# Altium PCB RF_PCB1.PcbDoc
Units mm, origin at the board's own origin, x right, y up, seen from the top; angles counter-clockwise.
Board outline 90.81 x 90.33 mm, 2 copper layers (Top Layer, Bottom Layer); 28 components, 22 nets, 93 pads, 0 vias.
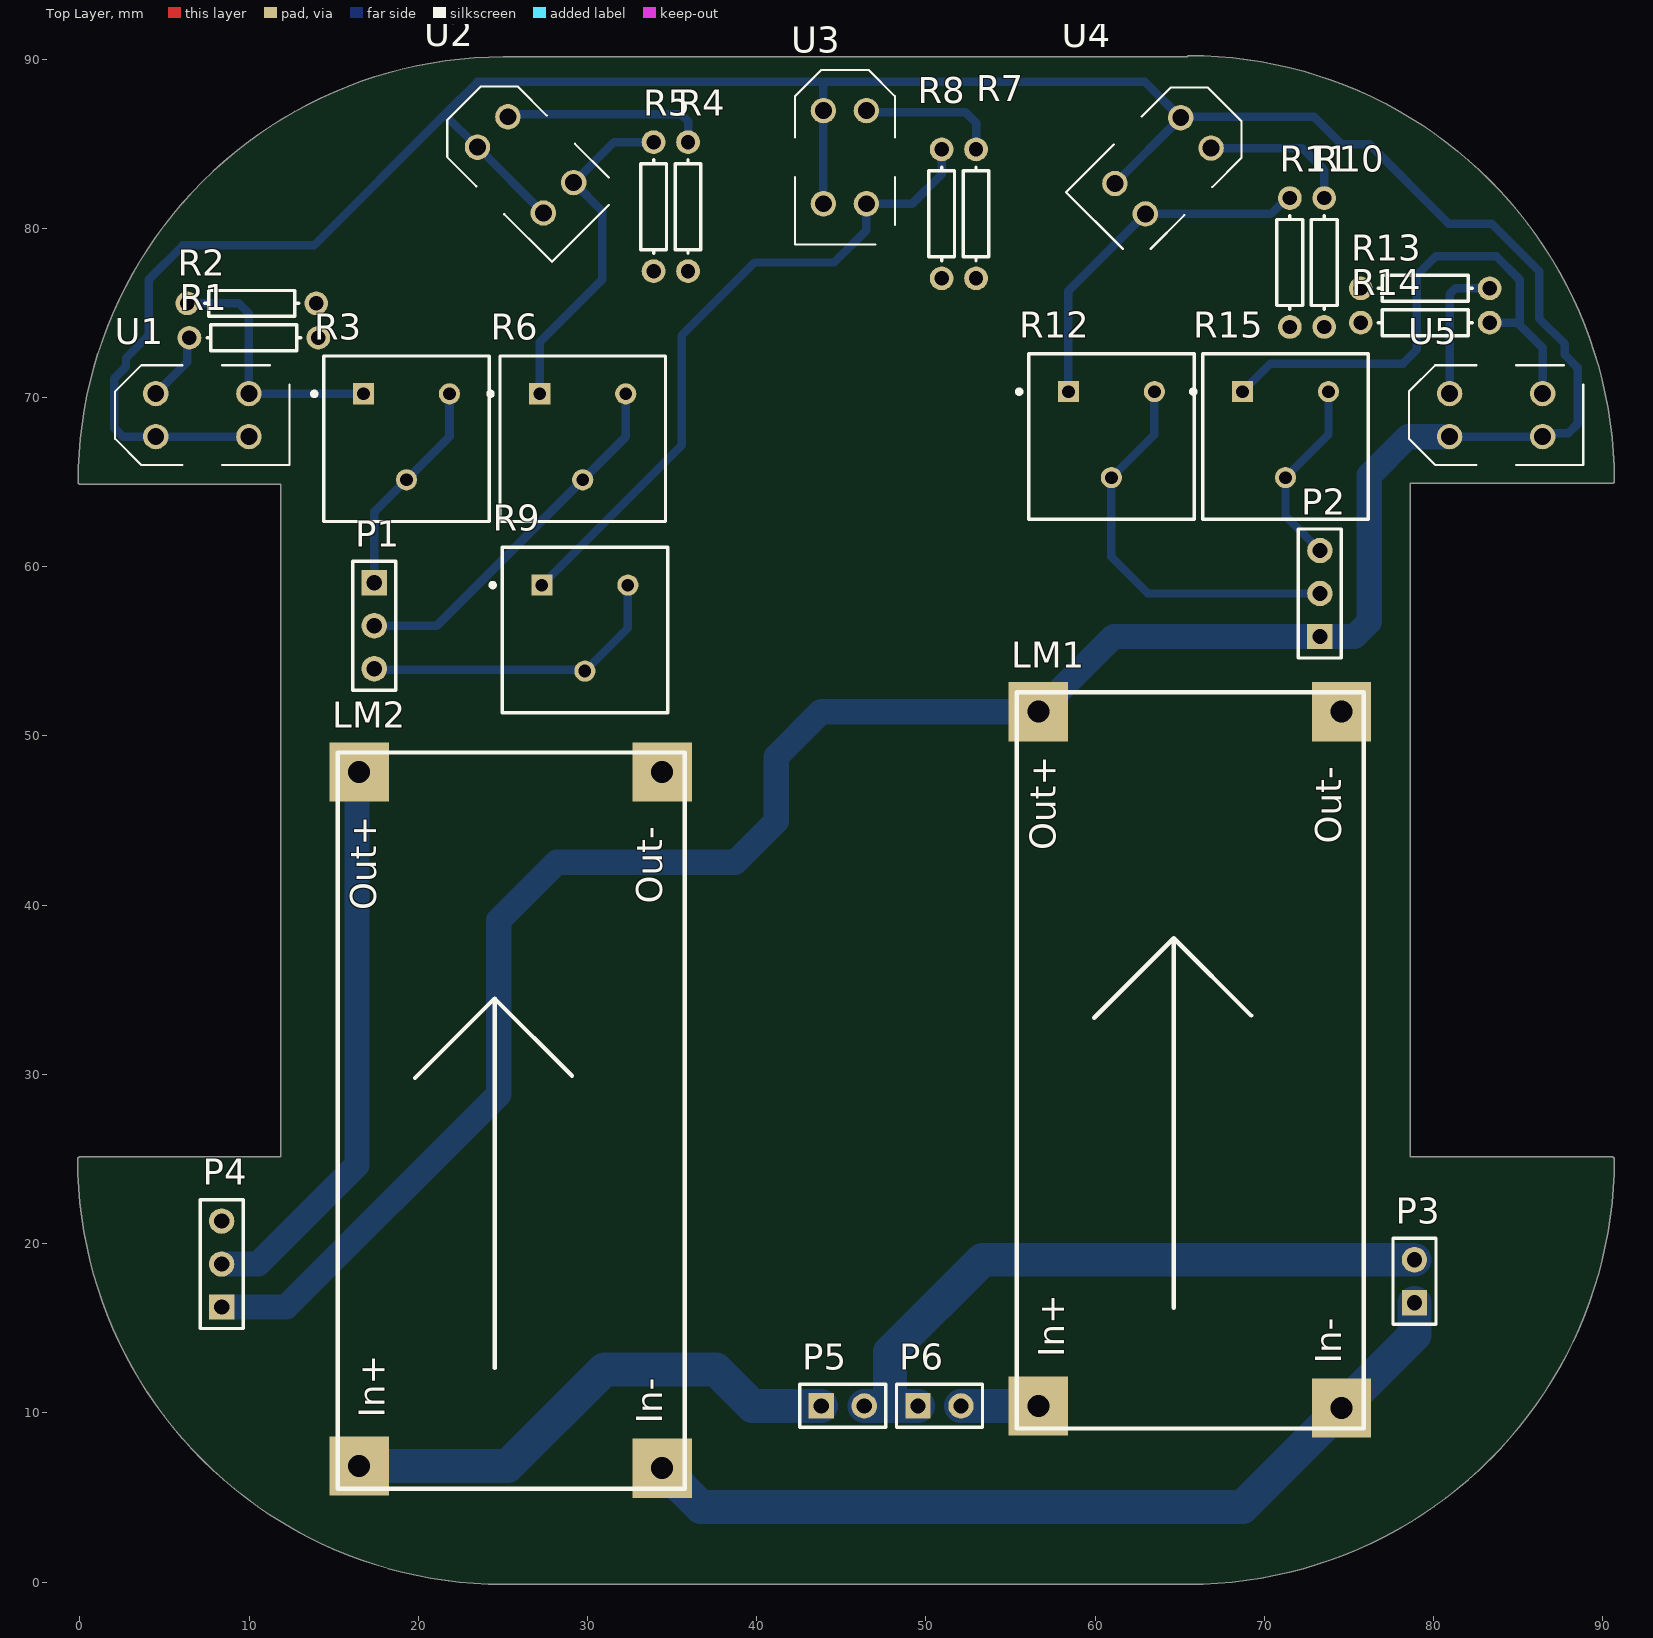
[diagram p0: Top Layer view]
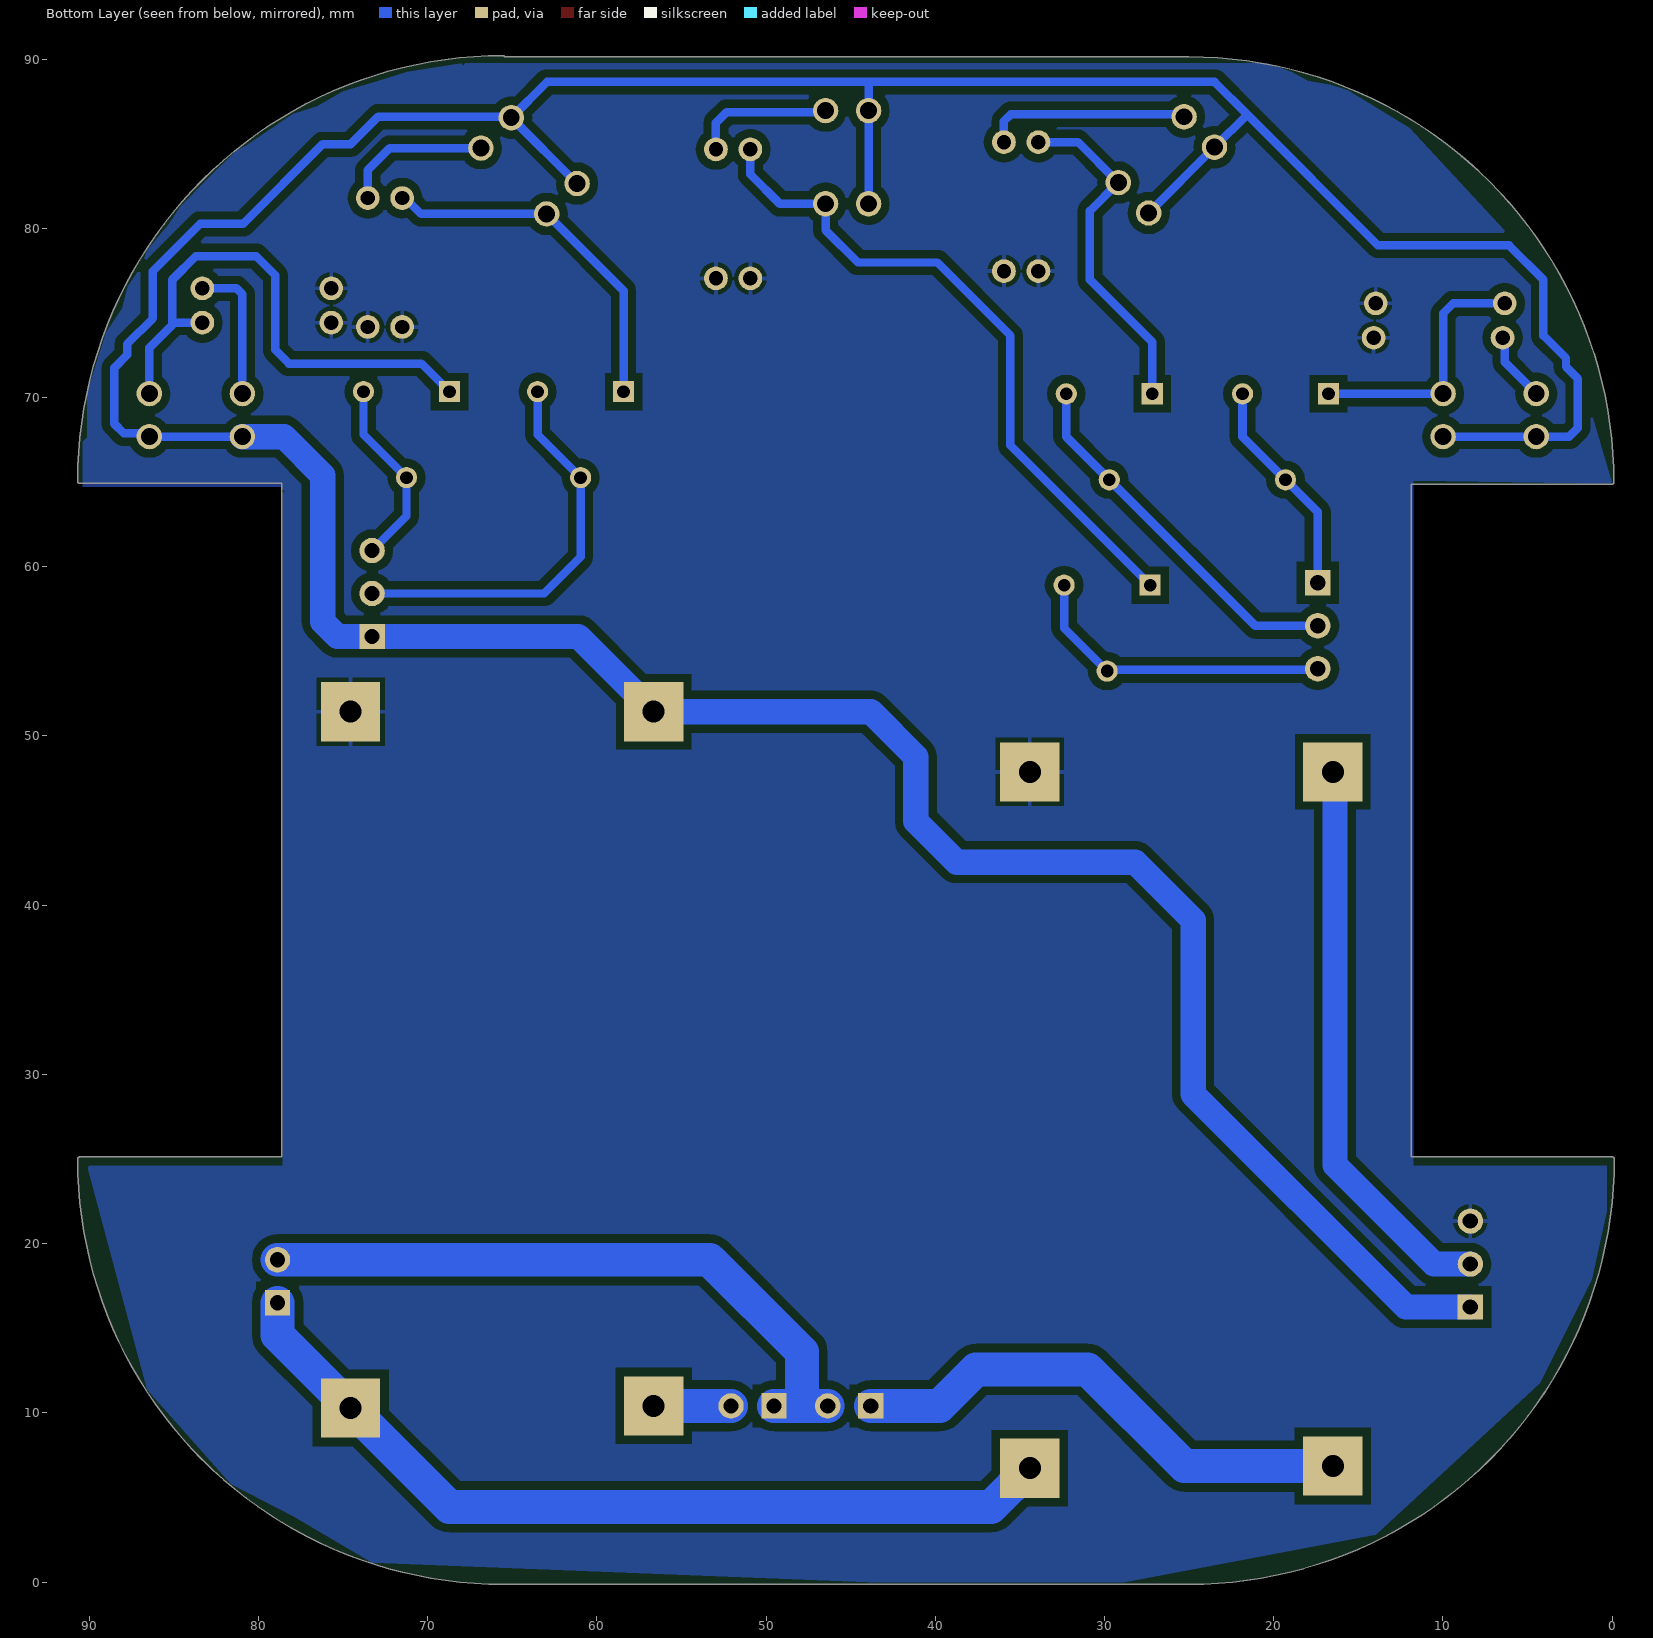
[diagram p1: Bottom Layer view, seen from below]

## Layer stack, top to bottom
Top Solder: solder mask 0.0102, Solder Resist, Dk 3.5
Top Layer: signal copper 0.0356
Dielectric 1: dielectric 0.32, FR-4, Dk 4.8
Bottom Layer: signal copper 0.0356
Bottom Solder: solder mask 0.0102, Solder Resist, Dk 3.5

## Board outline
-0.127,25 cw(c0,25) 0,25.127 11.873,25.127 11.873,64.873 0.024,64.873 cw(c0.024,65) -0.103,65 cw(c25.024,65) 25.024,90.127 65.435,90.127 cw(c65.551,90.075) 65.551,90.202 cw(c65.541,65.065) 90.678,65.065 cw(c65.541,65.065) 90.678,65.055 cw(c90.551,65.056) 90.523,64.931 cw(c90.495,65.056) 90.495,64.928 78.623,64.928 78.623,25.127 90.551,25.127 cw(c90.551,25) 90.678,25 cw(c90.551,25) 90.678,25 cw(c65.541,25.01) 65.532,-0.127 cw(c65.532,0) 65.531,-0.127 25,-0.127 cw(c25,25)

## Design rules (kind name [scope] priority, off if disabled: settings)
Clearance [All] p1: gap=0.5 ignorepadtopadclearanceinfootprint=TRUE
PolygonConnect [All] p1: connectstyle=Relief reliefconductorwidth=0.254 reliefentries=4 polygonreliefangle="90 Angle" airgapwidth=0.254
RoutingVias [All] p1: holewidth=0.711 width=1.27 viastyle="Through Hole" minholewidth=0.711 minwidth=1.27 maxholewidth=0.711 maxwidth=1.27
SolderMaskExpansion [All] p1: expansion=0.102
Width [All] p1: maxlimit=3 minlimit=0.254 preferedwidth=0.254
30 further rules are at their usual default settings.

## Components (designator, comment, footprint, x,y, rotation, side; value= is the part's Value field where it differs from the comment)
LM1 "LM2596-Adj" lm2596 67.691,26.924 r90 top
LM2 "LM2596-Adj" lm2596 27.559,23.368 r90 top
P1 "IR1" HDR1X3 17.399,59.055 r270 top
P2 "IR2" HDR1X3 73.279,55.88 r90 top
P3 "Header 2" HDR1X2 78.867,16.51 r90 top
P4 "Header 3" HDR1X3 8.382,16.256 r90 top
P5 "SW" HDR1X2 43.815,10.414 r0 top
P6 "SW2" HDR1X2 49.53,10.414 r0 top
R1 "Res1" AXIAL-0.3 10.287,73.533 r180 top value=220
R2 "Res1" AXIAL-0.3 10.16,75.565 r180 top value=10K
R3 "100" FP-3386F-MFG 19.304,67.564 r0 top value=30kO
R4 "Res1" AXIAL-0.3 35.941,81.28 r90 top value=220
R5 "Res1" AXIAL-0.3 33.904,81.28 r90 top value=10K
R6 "100" FP-3386F-MFG 29.718,67.564 r0 top value=30kO
R7 "Res1" AXIAL-0.3 52.959,80.85 r90 top value=220
R8 "Res1" AXIAL-0.3 50.927,80.85 r90 top value=10K
R9 "100" FP-3386F-MFG 29.845,56.261 r0 top value=30kO
R10 "Res1" AXIAL-0.3 73.533,77.978 r90 top value=220
R11 "Res1" AXIAL-0.3 71.501,77.978 r90 top value=10K
R12 "100" FP-3386F-MFG 60.96,67.691 r0 top value=30kO
R13 "Res1" AXIAL-0.3 79.502,76.454 r0 top value=220
R14 "Res1" AXIAL-0.3 79.502,74.422 r0 top value=10K
R15 "100" FP-3386F-MFG 71.247,67.691 r0 top value=30kO
U1 "TCRT5000" OPTO_TCRT5000 7.239,68.961 r180 top
U2 "TCRT5000" OPTO_TCRT5000 26.343,83.746 r135 top
U3 "TCRT5000" OPTO_TCRT5000 45.212,84.201 r90 top
U4 "TCRT5000" OPTO_TCRT5000 64.008,83.693 r45 top
U5 "TCRT5000" OPTO_TCRT5000 83.693,68.961 r180 top

## Footprints (in the part's own frame and the unit in brackets; to place one, negate y for a bottom-side part, rotate by r counter-clockwise, add the part's x,y. Pads: shape width x height; smd on the part's side, far side on the other; paste and mask are expansions set on the pad)
AXIAL-0.3 [mm] "Axial Device, Thru-Hole; 2 Leads; 0.3 in Pin Spacing"
  round 1.4 hole 0.85: 1(-3.81,0) 2(3.81,0)
  silkscreen extent -2.77,-0.76 2.77,0.76
FP-3386F-MFG [mm]
  rect 1.25x1.25 hole 0.75 paste-1000 mask+0: 1(-2.54,2.655)
  round 1.25 hole 0.75 paste-1000 mask+0: 2(0,-2.425) 3(2.54,2.655)
  silkscreen extent -5.57,-4.89 4.89,4.89, body extent -4.99,-4.99 4.99,4.99, height 0.25
HDR1X2 [mm] "Connector; Header; 2 Position"
  rect 1.5x1.5 hole 0.9: 1(0,0)
  round 1.5 hole 0.9: 2(2.54,0)
  silkscreen extent -1.27,-1.27 3.81,1.27
HDR1X3 [mm] "Connector; Header; 3 Position"
  rect 1.5x1.5 hole 0.9: 1(0,0)
  round 1.5 hole 0.9: 2(2.54,0) 3(5.08,0)
  silkscreen extent -1.27,-1.27 6.35,1.27
lm2596 [mm]
  rect 3.5x3.5 hole 1.3: 1(-16.51,11.049) 2(-16.637,-6.858) 3(24.511,-6.858) 4(24.511,11.049)
  silkscreen extent -17.85,-8.18 25.65,12.32, body extent -17.81,-8.21 25.69,12.79, height 13.68
OPTO_TCRT5000 [mm]
  round 1.5 hole 1: A(2.75,1.27) CATH(2.75,-1.27) COLL(-2.75,1.27) E(-2.75,-1.27)
  round 1 on Mech1: ""(-4.65,-2.45)
  round 2.5 on Mech1: ""(0,1.9) ""(0,-1.9)
  silkscreen extent -5.15,-2.95 5.15,2.95

## Part data
LM1 LM2: "Designed By @Alixahedi"
P1 P2: library part "Header 3", "Header, 3-Pin", LatestRevisionDate=17-Jul-2002, LatestRevisionNote="Re-released for DXP Platform.", Publisher="Altium Limited"
P3: "Header, 2-Pin", LatestRevisionDate=17-Jul-2002, LatestRevisionNote="Re-released for DXP Platform.", Publisher="Altium Limited"
P4: "Header, 3-Pin", LatestRevisionDate=17-Jul-2002, LatestRevisionNote="Re-released for DXP Platform.", Publisher="Altium Limited"
P5 P6: library part "Header 2", "Header, 2-Pin", LatestRevisionDate=17-Jul-2002, LatestRevisionNote="Re-released for DXP Platform.", Publisher="Altium Limited"
R1 R2 R4 R5 R7 R8 R10 R11 R13 R14: "Resistor", LatestRevisionDate=17-Jul-2002, LatestRevisionNote="Re-released for DXP Platform.", PackageDescription="Axial Device, Thru-Hole; 2 Leads; 0.3 in Pin Spacing", PackageReference=AXIAL-0.3, Published=8-Jun-2000, Publisher="Altium Limited"
R3 R6 R9 R12 R15: library part CMP-07234-000018-1, "TRIMMER 30K OHM 0.5W PC PIN TOP", Manufacturer=Bourns, Manufacturer Part Number=3386F-1-303LF, Package=3386F, Power Rating=0.5W, Resistance=30kO, Temperature="-55°C to +125°C", Temperature Coefficient=100ppm/°C, Temperature Range High=+125°C, Temperature Range Low=-55°C, Tolerance=10%, Voltage Rating=300V, Automotive=No, Category=Res, ComponentLink2Description=Datasheet, ComponentLink2URL=https://www.bourns.com/docs/Product-Datasheets/3386.pdf, Composition=Cermet, Device Class L1="Passive Components", Device Class L2=Resistors, Device Class L3="Variable Resistors and Potentiometers", Digikey Description="TRIMMER 30K OHM 0.5W PC PIN TOP", Height=5.08mm, Lead Free=Yes, Mouser Description="Trimmer Resistors - Through Hole 3/8 30Kohms 10% 0.5Watts Square", Octopart=https://octopart.com/3386f-1-303lf-bourns-1032328, RoHS=TRUE, Series=3386, Standoff Height=0.38mm
U1 U2 U3 U4 U5: "950 nm 60 mA Through Hole Reflective Optical Sensor with Transistor Output", Package=None, Availability=Unavailable, MP=TCRT5000, Price=None

## Nets (pads, with @x,y where several pads share a name; then routed paths per layer and width w, separated by ;. In a path a pad name is that pad's centre, name@x,y a point inside that pad or via, vN(x,y) a via of type N, cw(c..) or ccw(c..) an arc to the next point about the centre after c; other vN are vias at no path point)
+5: LM1.4 P2.1 P4.1 U1.A U1.COLL U2.A U2.COLL U3.A U3.COLL U4.A U4.COLL U5.A U5.COLL | length 255.3
  Bottom Layer w0.5: U1.COLL U1.A 2.54,67.691 2.032,68.199 2.032,71.12 2.73,71.819 2.73,72.326 4.064,73.66 4.064,76.962 6.096,78.994 13.843,78.994 21.59,86.741 ; U2.COLL U2.A 21.59,86.703 21.59,86.741 ; U3.COLL U3.A 43.942,88.646 ; U4.COLL U4.A 62.944,88.646 43.942,88.646 ; U4.A@65.151,86.589 72.923,86.589 74.549,84.963 76.2,84.963 80.899,80.264 83.439,80.264 86.233,77.47 86.233,74.676 87.757,73.152 87.757,72.517 88.519,71.755 88.519,68.453 87.943,67.877 86.629,67.877 U5.COLL U5.A ; 21.59,86.741 23.495,88.646 43.942,88.646
  Bottom Layer w1.5: P4.1 12.192,16.256 24.765,28.829 24.765,39.116 28.194,42.545 38.735,42.545 41.148,44.958 41.148,48.768 43.815,51.435 LM1.4 61.087,55.88 P2.1 75.321,55.88 76.2,56.759 76.2,65.405 78.486,67.691 U5.A
GND: LM1.3 LM2.3 P4.3 R1.1 R2.1 R4.1 R5.1 R7.1 R8.1 R10.1 R11.1 R13.1 R14.1
IR1: P1.1 R3.2 R3.3 | length 13
  Bottom Layer w0.508: P1.1 17.399,63.234 R3.2 21.844,67.679 R3.3
IR2: P1.2 R6.2 R6.3 | length 22
  Bottom Layer w0.5: P1.2 21.094,56.515 R6.2 32.258,67.679 R6.3
IR3: P1.3 R9.2 R9.3 | length 18.6
  Bottom Layer w0.5: P1.3 17.468,53.906 29.776,53.906 R9.2 32.385,56.376 R9.3
IR4: P2.2 R12.2 R12.3 | length 24
  Bottom Layer w0.5: R12.3 63.5,67.806 R12.2 60.96,60.579 63.119,58.42 P2.2
IR5: P2.3 R15.2 R15.3 | length 11.3
  Bottom Layer w0.5: P2.3 71.247,62.992 R15.2 73.787,67.806 R15.3
NetLM1_1: LM1.1 P6.2 | length 4.6
  Bottom Layer w2: P6.2 LM1.1
NetLM1_2: LM1.2 LM2.2 P3.1 | length 51.5
  Bottom Layer w2: LM2.2 36.703,4.445 68.707,4.445 LM1.2 78.867,14.605 P3.1
NetLM2_1: LM2.1 P5.1 | length 30.6
  Bottom Layer w2: LM2.1 25.273,6.858 30.988,12.573 37.592,12.573 39.751,10.414 P5.1
NetP3_2: P3.2 P5.2 P6.1 | length 39.6
  Bottom Layer w2: P5.2 47.879,10.414 ; P6.1 47.879,10.414 ; P3.2 53.34,19.05 47.879,13.589 47.879,10.414
NetR1_2: R1.2 U1.CATH | length 4.1
  Bottom Layer w0.5: U1.CATH 6.341,72.083 6.341,73.397 R1.2
NetR2_2: R2.2 R3.1 U1.E | length 15.4
  Bottom Layer w0.5: R2.2 9.398,75.565 9.989,74.974 U1.E 10.001,70.219 R3.1
NetR4_2: R4.2 U2.CATH | length 12.1
  Bottom Layer w0.5: U2.CATH 25.448,86.741 35.535,86.741 35.941,86.335 R4.2
NetR5_2: R5.2 R6.1 U2.E | length 20.4
  Bottom Layer w0.5: R6.1 27.178,73.279 30.861,76.962 30.861,81.024 U2.E 31.575,85.09 R5.2
NetR7_2: R7.2 U3.CATH | length 8.3
  Bottom Layer w0.5: U3.CATH 46.483,86.951 46.566,86.868 52.324,86.868 52.959,86.233 R7.2
NetR8_2: R8.2 R9.1 U3.E | length 39.9
  Bottom Layer w0.5: R9.1 35.56,67.171 35.56,73.66 39.878,77.978 44.577,77.978 46.482,79.883 U3.E 49.193,81.451 50.927,83.185 R8.2
NetR10_2: R10.2 U4.CATH | length 8.9
  Bottom Layer w0.5: U4.CATH 72.232,84.74 73.533,83.439 R10.2
NetR11_2: R11.2 R12.1 U4.E | length 21.3
  Bottom Layer w0.5: R12.1 58.42,76.309 U4.E 70.388,80.85 71.326,81.788 R11.2
NetR13_2: R13.2 U5.CATH | length 8.5
  Bottom Layer w0.5: U5.CATH U5.CATH@80.943,70.314 ; U5.CATH@81.026,70.231 U5.CATH@80.943,70.314 ; R13.2 81.298,76.454 80.943,76.099 U5.CATH@80.943,70.314
NetR14_2: R14.2 R15.1 U5.E | length 32
  Bottom Layer w0.5: R15.1 70.37,72.009 78.193,72.009 78.994,72.81 78.994,77.216 80.137,78.359 83.693,78.359 85.09,76.962 85.09,74.549 ; R14.2 84.963,74.422 85.09,74.549 ; U5.E 86.443,72.942 85.09,74.295 85.09,74.549
V_MTR: LM2.4 P4.2 | length 33.7
  Bottom Layer w1.5: P4.2 10.541,18.796 16.383,24.638 16.383,47.752 LM2.4
pads on no net: U1. U2. U3. U4. U5.

## Polygon pours and split planes (outlines as drawn)
GND on Bottom Layer "Bottom Layer-GND" (solid, pour order 10): 0,64.892 11.761,65.095 11.761,24.594 0.331,24.594 0.331,21.927 1.22,17.863 4.268,11.767 13.969,2.799 28.811,0 43.954,0 73.282,1.152 77.928,3.893 81.611,5.798 86.564,11.382 90.106,24.594 81.992,24.594 78.563,24.594 78.563,64.345 78.436,64.472 78.69,64.726 90.374,64.726 90.374,67.393 90.12,67.647 90.12,70.314 89.547,72.082 88.977,73.87 88.056,75.267 87.707,76.537 86.879,77.807 86.564,78.696 85.288,80.236 85.044,80.624 84.659,81.236 83.008,82.887 81.273,84.622 80.677,84.901 77.928,86.758 76.531,87.205 74.989,88.106 72.9,88.729 71.198,89.236 68.022,89.745 67.895,89.618 67.768,89.745 63.196,89.745 20.397,89.745 18.968,89.236 17.984,88.729 16.622,88.475 15.636,88.169 12.007,85.939 3.479,76.772
no net on Bottom Layer "Bottom Layer-No Net 1" (solid, pour order 12): 11.684,85.471
no net on Bottom Layer "Bottom Layer-No Net" (solid, pour order 8): 5.588,44.069

## Silkscreen, mask and mechanical layers (free items; w line width, h text height)
Mechanical 1:
  lines w0.254: 12.024,65 0.024,65 cw(c25.024,65) 25.024,90 65.476,90 ; 19.431,90.678 45.22,64.889 45.22,64.77 ; 45.22,92.321 45.22,65 45.315,65 73.66,93.345 ; 65.551,90.075 cw(c65.541,65.065) 90.551,65.056 ; 78.495,25.056 78.495,65.056 ; 78.551,25 90.551,25 cw(c65.541,25.01) 65.532,0 25,0 cw(c25,25) 0,25 12,25 12,65 78.44,65 78.495,65.056 ; 90.495,65.056 78.495,65.056

## Text inside footprints (layer, text, board x,y; h text height)
LM1: Top Overlay "Out+" at 57.658,43.256 h1.52 r90; Top Overlay "Out-" at 74.549,43.637 h1.52 r90; Top Overlay "In-" at 74.549,12.903 h1.52 r90; Top Overlay "In+" at 58.166,13.284 h1.52 r90
LM2: Top Overlay "Out+" at 17.526,39.7 h1.52 r90; Top Overlay "Out-" at 34.417,40.081 h1.52 r90; Top Overlay "In-" at 34.417,9.347 h1.52 r90; Top Overlay "In+" at 18.034,9.728 h1.52 r90